# Altium PCB REF-Base.PcbDoc
Units mil, origin at the board's own origin, x right, y up, seen from the top; angles counter-clockwise.
Board outline 1890.07 x 2283.46 mil, 2 copper layers (Top1, Bottom2), stack 63.824 mil thick; 59 components, 105 nets, 332 pads, 188 vias.
Unrouted connection lines stored in the file: 57.
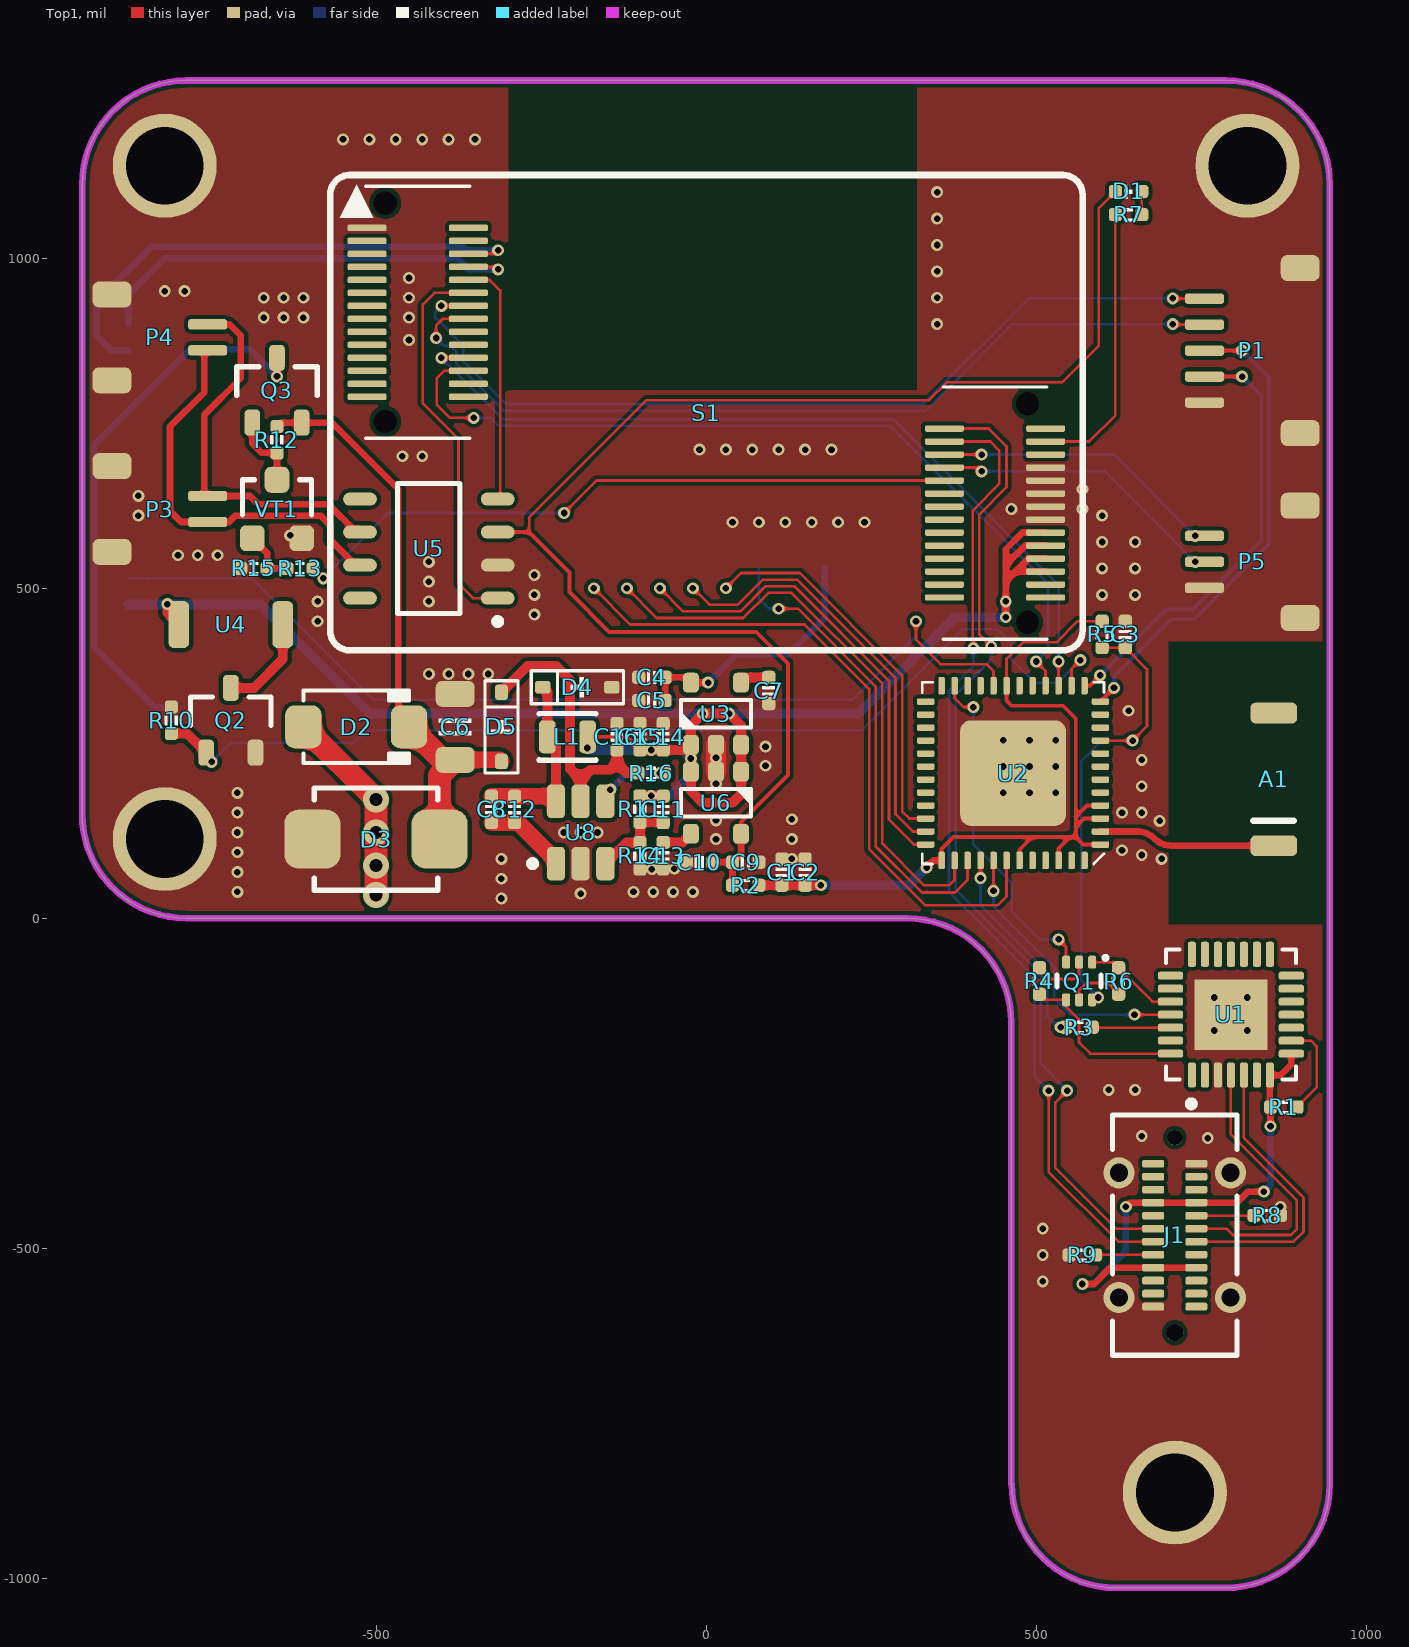
[diagram p0: Top1 view]
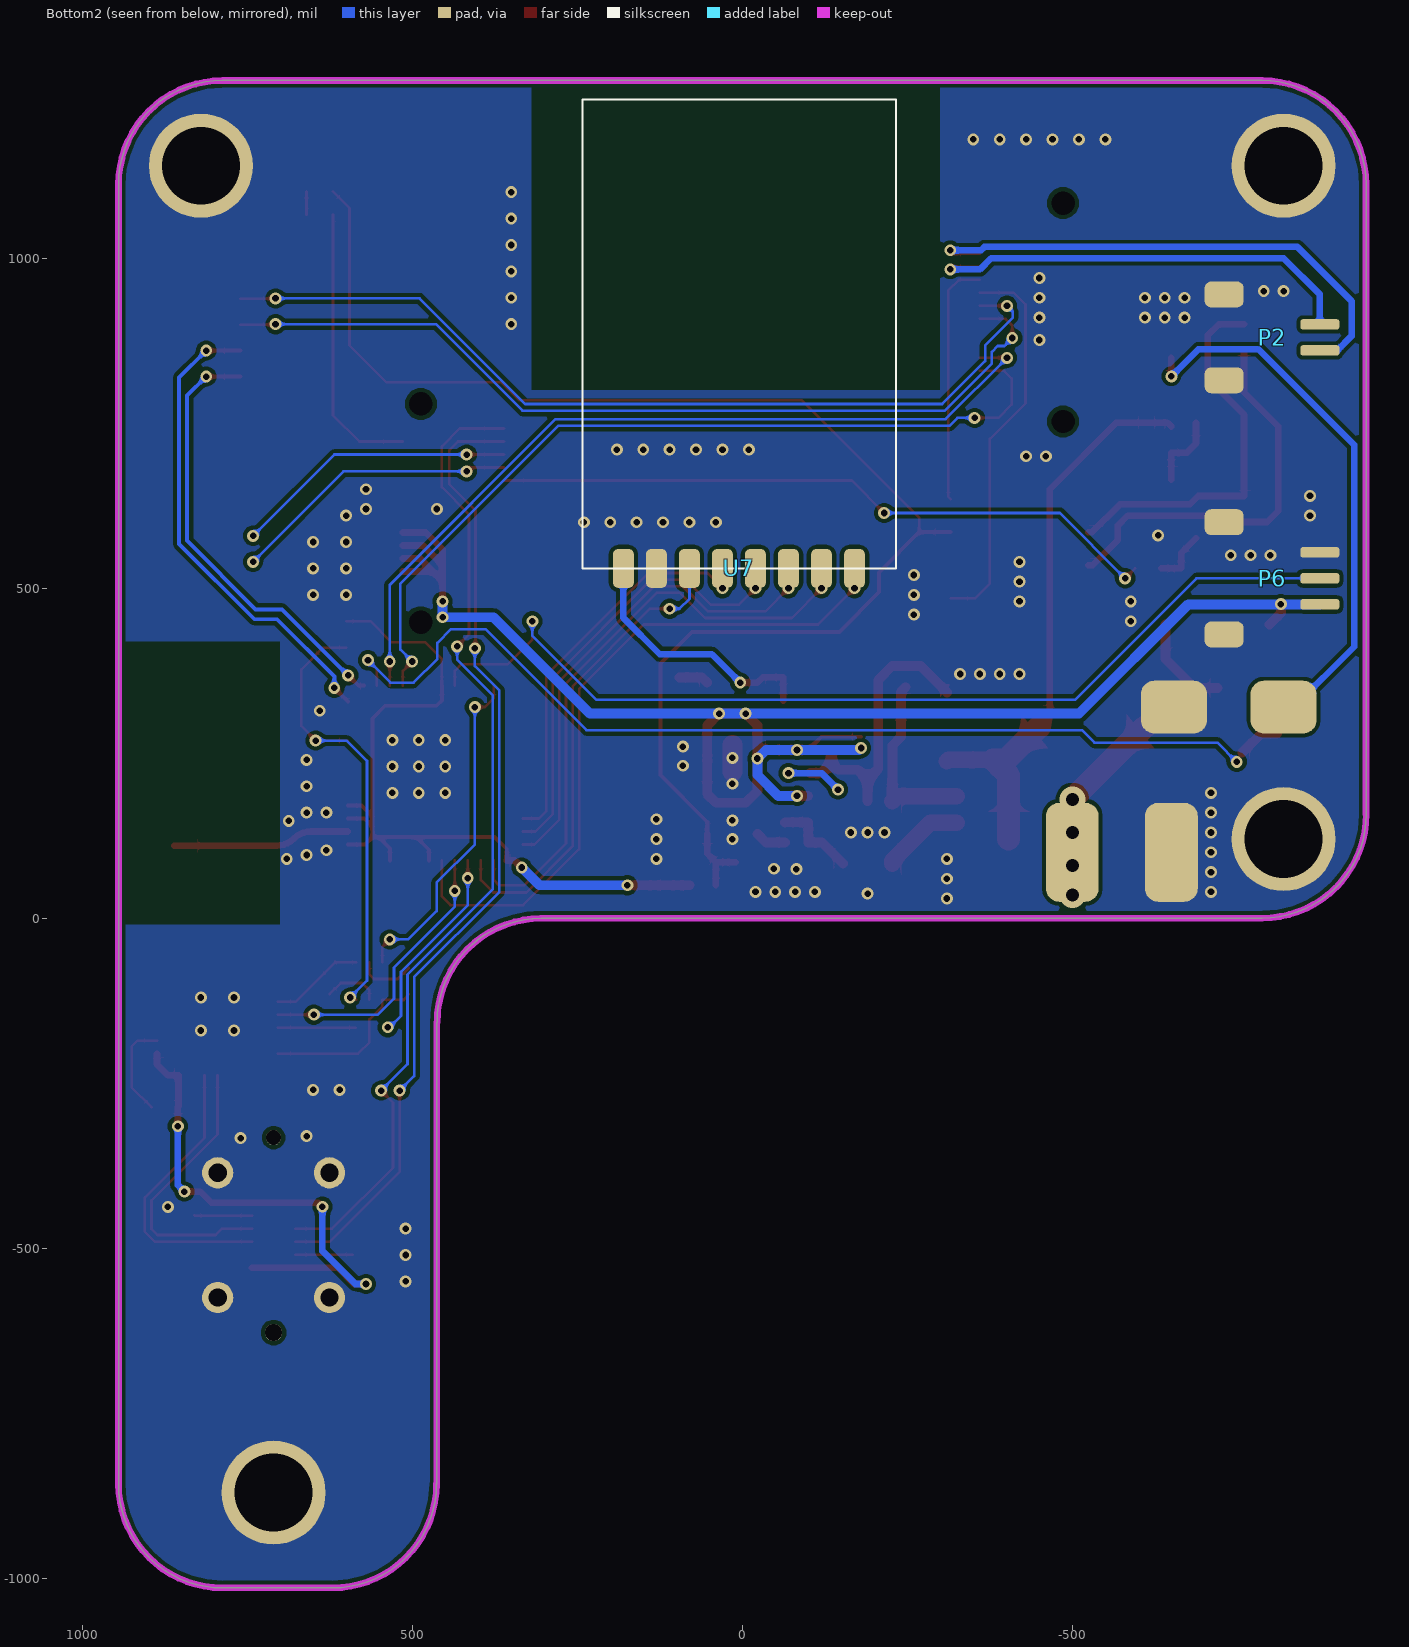
[diagram p1: Bottom2 view, seen from below]
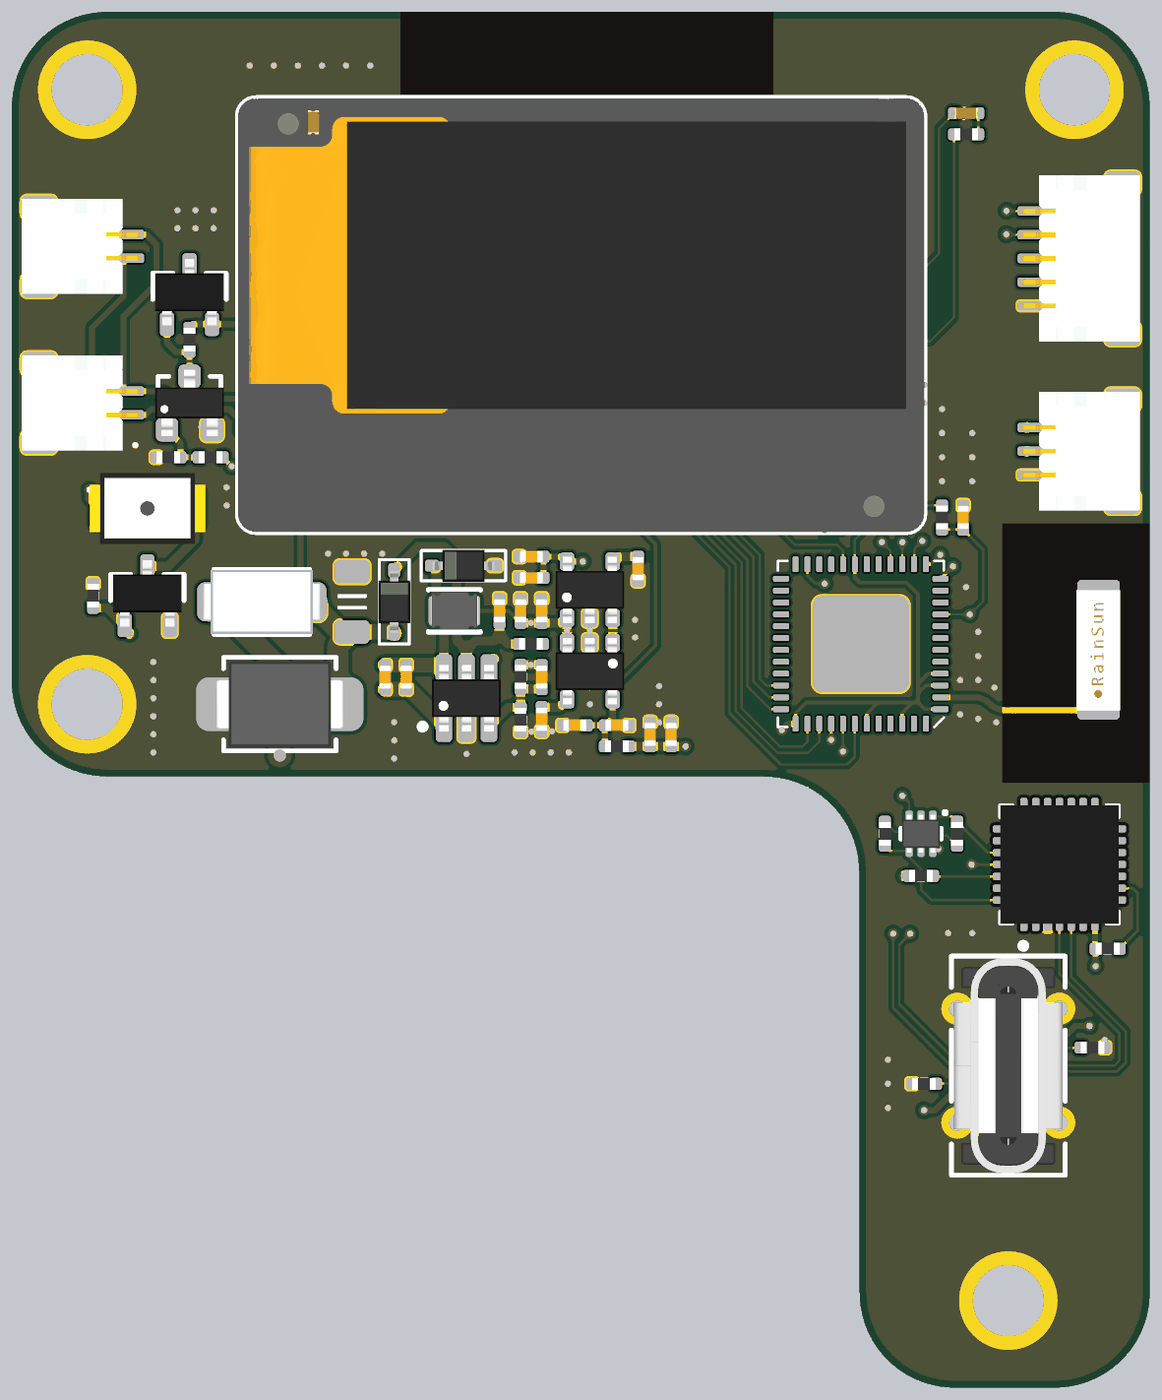
[diagram p2: 3D render of the assembled board from above, using the file's embedded part models]

## Layer stack, top to bottom
Top Solder: solder mask 0.4, Solder Resist, Dk 3.5
Top1: signal copper 1.4
Dielectric1: core 61.0236, FR-4, Dk 4.2
Bottom2: signal copper 1.4
Bottom Solder: solder mask 0.4, Solder Resist, Dk 3.5

## Board outline
-944.88,157.81 -944.88,1111.68 cw(c-787.4,1111.68) -787.4,1269.16 787.4,1269.16 cw(c787.4,1111.68) 944.88,1111.68 944.88,-856.82 cw(c787.4,-856.82) 787.4,-1014.3 620.7,-1014.3 cw(c620.7,-856.82) 463.22,-856.82 462.52,-857.52 462.52,-157.7 462.3,-157.7 ccw(c304.82,-157.7) 304.82,-0.22 304.82,0 -787.7,0 -787.7,0.33 cw(c-787.7,157.81)

## Design rules (kind name [scope] priority, off if disabled: settings)
Clearance Clearance_Logo [InNetClass('Logo')] p1: gap=8 ignorepadtopadclearanceinfootprint=FALSE
Clearance [All] p2: gap=6 ignorepadtopadclearanceinfootprint=FALSE
ComponentClearance [All] p1: gap=0 collisioncheckmode=3 verticalgap=0 showdistances=FALSE
DiffPairsRouting [All] p1: maxlimit=9 minlimit=9 mostfreqgap=9 toplayer_minwidth=15 toplayer_maxwidth=15 toplayer_prefwidth=15 bottomlayer_minwidth=15 bottomlayer_maxwidth=15 bottomlayer_prefwidth=15 maxuncoupledlength=500
FanoutControl Fanout_BGA [All] p1: bgadir=Out bgaviamode=Centered fanoutstyle=Auto fanoutdirection=Alternating viagrid=1 // Fanout_BGA (Default Rule)
HoleSize [All] p1: absolutevalues=TRUE maxlimit=10000 minlimit=8 maxpercent=80.000 minpercent=20.000
MinimumSolderMaskSliver [All] p1 off: minsoldermaskwidth=2
PlaneClearance [All] p1: clearance=8
PlaneConnect [All] p1: planeconnectstyle=Direct reliefexpansion=20 reliefentries=4 reliefconductorwidth=10 reliefairgap=10
PolygonConnect [All] p1: connectstyle=Direct reliefconductorwidth=10 reliefentries=4 polygonreliefangle="90 Angle" airgapwidth=10
RoutingVias [All] p1: holewidth=8 width=16 viastyle="Through Hole" minholewidth=6 minwidth=12 maxholewidth=28 maxwidth=50
SilkToSilkClearance [All] p1: silktosilkclearance=0
SilkToSolderMaskClearance [IsPad] p1: minsilkscreentomaskgap=0 clearancetoexposedcopper=TRUE
SolderMaskExpansion [All] p1: expansion=3 istentingtop=FALSE
Width Logo [InNetClass('Logo')] p1: maxlimit=100 minlimit=0.1 preferedwidth=10
Width GND [(InNet('AGND') OR InNet('GND'))] p2: maxlimit=50 minlimit=4 preferedwidth=10
Width VCC [(InNet('VDD_SYS_3.3V') OR InNet('VDD_AV_3.3V') OR InNet('VDD_5V') OR InNet('VDD1V2-SYS') OR InNet('VDD1V1-EPHY') OR InNet('VDD-CPUX') OR InNet('VDD-CPUS') OR InNet('VDD-CPUFB') OR InNet('VCC-DRAM'))] p3: maxlimit=50 minlimit=4 preferedwidth=10
Width [All] p4: maxlimit=10000 minlimit=4 preferedwidth=4
21 further rules are at their usual default settings.

## Components (designator, comment, footprint, x,y, rotation, side; value= is the part's Value field where it differs from the comment)
A1 "RAINSUN" ANT-Rainsun-AN5120 860,210 r90 top
C1 "10uF" CAP_0402 115,70 r270 top value=0.1u
C2 "0.1uF" CAP_0402 150,70 r270 top value=0.1u
C3 "1uF" CAP_0402 635,430 r90 top value=0.1u
C4 "0.1uF" CAP_0402 -82,365 r0 top value=0.1u
C5 "10uF" CAP_0402 -82,330 r0 top value=0.1u
C6 "100uF" 1206-CAP -380,290 r270 top value=0.1u
C7 "10nF" CAP_0402 95,345 r90 top value=0.1u
C8 "0.1uF" CAP_0402 -325,165 r270 top value=0.1u
C9 "0.1uF" CAP_0402 60,85 r180 top value=0.1u
C10 "10uF" CAP_0402 -10,85 r0 top value=0.1u
C11 "100pF" CAP_0402 -65,165 r270 top value=0.1u
C12 "0.1uF" CAP_0402 -290,165 r270 top value=0.1u
C13 "10nF" CAP_0402 -65,95 r90 top value=0.1u
C14 "0.1uF" CAP_0402 -65,275 r270 top value=0.1u
C15 "10uF" CAP_0402 -100,275 r270 top value=0.1u
C16 "10uF/50V" CAP_0402 -135,275 r270 top value=0.1u
D1 "color?" LED_0402_RED 640,1101 r0 top
D2 "SS54" DO-214AC -530,290 r0 top
D3 "SMBJ28CA" SMBJ-CA_MFG -500,120 r0 top
D4 "二极管-5819W" SOD-323 -195,350 r180 top
D5 "二极管-5819W" SOD-323 -310,290 r90 top
J1 "USB-TYPE-C-STAND" USB-TYPE-C-STAND 710,-480 r90 top locked
L1 "6.8uH" IND-201612 -210,275 r0 top
P1 "SH1.0-5P" SH1.0-5P 755,860 r90 top
P2 "SH1.0-2P" SH1.0-2P -875,880 r270 bottom
P3 "SH1.0-2P" SH1.0-2P -755,620 r270 top
P4 "SH1.0-2P" SH1.0-2P -755,880 r270 top
P5 "SH1.0-3P" SH1.0-3P 755,540 r90 top
P6 "SH1.0-3P" SH1.0-3P -875,515 r270 bottom
Q1 "BC847BVC-7" SOT563-6 565,-95 r180 top
Q2 "AO3400A" SOT23-3 -720,300 r90 top
Q3 "AO3401A" SOT23-3 -650,800 r90 top
R1 "10K" RES_0402 875,-286 r0 top value=22R
R2 "0R" RES_0402 60,50 r0 top value=22R
R3 "200R" RES_0402 565,-165 r0 top value=22R
R4 "12K" RES_0402 505,-95 r90 top value=22R
R5 "10K" RES_0402 600,430 r270 top value=22R
R6 "12K" RES_0402 625,-95 r270 top value=22R
R7 "2K" RES_0402 640,1066 r0 top value=22R
R8 "5.1K" RES_0402 850,-450 r0 top value=22R
R9 "5.1K" RES_0402 570,-510 r180 top value=22R
R10 "10K" RES_0402 -810,300 r270 top value=22R
R11 "10K" RES_0402 -100,165.43 r90 top value=22R
R12 "2K" RES_0402 -650,725 r90 top value=22R
R13 "1K" RES_0402 -615,530 r180 top value=22R
R14 "1.8K" RES_0402 -100,94.57 r90 top value=22R
R15 "10K" RES_0402 -685,530 r180 top value=22R
R16 "1M" RES_0402 -83,220 r0 top value=22R
S1 "REF-Unit" REF-UNIT -569.54,405.93 r0 top locked
U1 "CP2102" QFN-28 795,-146 r90 top value=Value
U2 "ESP32_SIP" QFN-48_7X7 465,220 r180 top
U3 "LP2992 3V3" SOT23-5 15,310 r90 top
U4 "DET402" DET402 -720,445 r0 top
U5 "SN65HVD232D" SO-8 -420,560 r180 top
U6 "LP2992 3V3" SOT23-5 15,175 r270 top
U7 "NRF24L01" NRF24L01-MODULE 180,530 r180 bottom locked
U8 "ME3116" SOT23-6 -190,130 r90 top
VT1 "S8050" SMT_TRIODE_NPN -650,620 r0 top

## Footprints (in the part's own frame and the unit in brackets; to place one, negate y for a bottom-side part, rotate by r counter-clockwise, add the part's x,y. Pads: shape width x height; smd on the part's side, far side on the other; paste and mask are expansions set on the pad)
1206-CAP [mm]
  rrect50% 1x1.5 smd: 1(-1.27,0) 2(1.27,0)
  silkscreen extent -0.3,-0.61 0.3,0.61, body extent -1.5,-0.75 1.5,0.75, height 1.5
ANT-Rainsun-AN5120 [mm] "选择焊盘"
  rrect50% 0.8x1.8 smd: 1(-2.54,0) ""(2.563,0)
  silkscreen extent -1.57,-0.76 -1.57,0.79, body extent -2.57,-0.91 2.54,0.94, height 1.32
CAP_0402 [mil]
  rrect50% 20x20 smd: 1(-20,0) 2(20,0)
  silkscreen extent -7,-9 7,9, body extent -20,-10 20,10, height 20
DET402 [mm]
  rrect50% 0.8x1.8 smd: 1(-2,0) 2(2,0)
  body extent -2.45,-1.5 2.44,1.5, height 2.03
DO-214AC [mil] "SMA"
  rrect50% 55x65 smd: 1(-80,0) 2(80,0)
  silkscreen extent -80,-55 80,55, body extent -98,-53 98,53, height 85
IND-201612 [mil]
  rrect50% 25x50 smd paste+0 mask+0: 1(-30.46,0) 2(30.46,0)
  silkscreen extent -43,-35 43,35, body extent -39,-31 39,32, height 37
LED_0402_RED [mil]
  rrect50% 20x20 smd: 1(-20,0) 2(20,0)
  silkscreen extent -6,-10 6,10, body extent -20,-10 20,10, height 18
NRF24L01-MODULE [mm]
  rrect50% 0.8x1.5 smd: 1(0,0) 2(1.27,0) 3(2.54,0) 4(3.81,0) 5(5.08,0) 6(6.35,0) 7(7.62,0) 8(8.89,0)
  silkscreen extent -1.57,0 10.49,18.03
QFN-28 [mil]
  rrect50% 38x12 smd mask+5: 1(-91.5,59.06) 2(-91.5,39.37) 3(-91.5,19.68) 4(-91.5,0) 5(-91.5,-19.69) 6(-91.5,-39.37) 7(-91.5,-59.06) 15(91.5,-59.06) 16(91.5,-39.37) 17(91.5,-19.69) 18(91.5,0) 19(91.5,19.68) 20(91.5,39.37) 21(91.5,59.06)
  rrect50% 12x38 smd mask+5: 8(-59.06,-91.5) 9(-39.37,-91.5) 10(-19.68,-91.5) 11(0,-91.5) 12(19.68,-91.5) 13(39.37,-91.5) 14(59.06,-91.5) 22(59.06,91.5) 23(39.37,91.5) 24(19.68,91.5) 25(0,91.5) 26(-19.68,91.5) 27(-39.37,91.5) 28(-59.06,91.5)
  rect 106.3x110.24 smd: 29(0,0)
  silkscreen extent -140,-98 98,98, body extent -98,-98 98,98, height 35
QFN-48_7X7 [mm]
  rrect50% 0.675x0.25 smd: 1(-3.363,2.75) 2(-3.363,2.25) 3(-3.363,1.75) 4(-3.363,1.25) 5(-3.363,0.75) 6(-3.363,0.25) 7(-3.363,-0.25) 8(-3.363,-0.75) 9(-3.363,-1.25) 10(-3.363,-1.75) 11(-3.363,-2.25) 12(-3.363,-2.75) 25(3.363,-2.75) 26(3.363,-2.25) 27(3.363,-1.75) 28(3.363,-1.25) 29(3.363,-0.75) 30(3.363,-0.25) 31(3.363,0.25) 32(3.363,0.75) 33(3.363,1.25) 34(3.363,1.75) 35(3.363,2.25) 36(3.363,2.75)
  rrect50% 0.25x0.675 smd: 13(-2.75,-3.363) 14(-2.25,-3.363) 15(-1.75,-3.363) 16(-1.25,-3.363) 17(-0.75,-3.363) 18(-0.25,-3.363) 19(0.25,-3.363) 20(0.75,-3.363) 21(1.25,-3.363) 22(1.75,-3.363) 23(2.25,-3.363) 24(2.75,-3.363) 37(2.75,3.363) 38(2.25,3.363) 39(1.75,3.363) 40(1.25,3.363) 41(0.75,3.363) 42(0.25,3.363) 43(-0.25,3.363) 44(-0.75,3.363) 45(-1.25,3.363) 46(-1.75,3.363) 47(-2.25,3.363) 48(-2.75,3.363)
  rrect20% 4.064x4.064 smd: 49(0,0)
  silkscreen extent -3.5,-3.5 3.5,3.5, body extent -3.5,-3.5 3.5,3.5, height 1
REF-UNIT [mm]
  rrect50% 1.5x0.25 smd: 1(1.422,16.255) 2(5.322,16.255) 3(1.422,15.755) 4(5.322,15.755) 5(1.422,15.255) 6(5.322,15.255) 7(1.422,14.755) 8(5.322,14.755) 9(1.422,14.255) 10(5.322,14.255) 11(1.422,13.755) 12(5.322,13.755) 13(1.422,13.255) 14(5.322,13.255) 15(1.422,12.755) 16(5.322,12.755) 17(1.422,12.255) 18(5.322,12.255) 19(1.422,11.755) 20(5.322,11.755) 21(1.422,11.255) 22(5.322,11.255) 23(1.422,10.755) 24(5.322,10.755) 25(1.422,10.255) 26(5.322,10.255) 27(1.422,9.755) 28(5.322,9.755) 29(23.634,8.533) 30(27.534,8.533) 31(23.634,8.033) 32(27.534,8.033) 33(23.634,7.533) 34(27.534,7.533) 35(23.634,7.033) 36(27.534,7.033) 37(23.634,6.533) 38(27.534,6.533) 39(23.634,6.033) 40(27.534,6.033) 41(23.634,5.533) 42(27.534,5.533) 43(23.634,5.033) 44(27.534,5.033) 45(23.634,4.533) 46(27.534,4.533) 47(23.634,4.033) 48(27.534,4.033) 49(23.634,3.533) 50(27.534,3.533) 51(23.634,3.033) 52(27.534,3.033) 53(23.634,2.533) 54(27.534,2.533) 55(23.634,2.033) 56(27.534,2.033)
  round 0.6 hole 0.9 unplated: ""(2.123,8.806) ""(2.123,17.206) ""(26.833,1.082) ""(26.833,9.482)
  silkscreen extent 0,0 28.96,18.29, body extent 0,0 28.96,18.29, height 7.52
RES_0402 [mil]
  rrect50% 20x20 smd: 1(-20,0) 2(20,0)
  silkscreen extent -6,-10 6,10, body extent -20,-10 20,10, height 14
SH1.0-2P [mm]
  rrect50% 0.4x1.5 smd: 1(-0.5,0) 2(0.5,0)
  rrect50% 1x1.5 smd: SH1(-1.651,-3.683) SH2(1.651,-3.683)
  body extent -2,-4.42 2,0.54, height 3.06
SH1.0-3P [mm]
  rrect50% 0.4x1.5 smd: 1(-1,0) 2(0,0) 3(1,0)
  rrect50% 1x1.5 smd: SH1(-2.159,-3.683) SH2(2.159,-3.683)
  body extent -2.5,-4.42 2.5,0.54, height 3.06
SH1.0-5P [mm]
  rrect50% 0.4x1.5 smd: 1(-2,0) 2(-1,0) 3(0,0) 4(1,0) 5(2,0)
  rrect50% 1x1.5 smd: SH1(-3.175,-3.683) SH2(3.175,-3.683)
  body extent -3.5,-4.42 3.5,0.54, height 3.06
SMBJ-CA_MFG [mm]
  rrect50% 2.16x2.26 smd paste+0 mask+0: 1(-2.45,0) 2(2.45,0)
  silkscreen extent -2.37,-1.97 2.37,1.97, body extent -2.7,-1.81 2.7,1.81, height 2.62
SMT_TRIODE_NPN [mm] "Surface mount NPN transistor, package SOT-23"
  rrect50% 0.95x1 smd: 1(-0.95,-1.125) 2(0.95,-1.125) 3(0,1.125)
  silkscreen extent -1.33,-0.22 1.32,1.13, body extent -1.45,-1.4 1.45,1.4, height 1.3
SO-8 [mm]
  oval 1.3x0.5 smd: 1(-2.65,1.905) 2(-2.65,0.635) 3(-2.65,-0.635) 4(-2.65,-1.905) 5(2.65,-1.905) 6(2.65,-0.635) 7(2.65,0.635) 8(2.65,1.905)
  silkscreen extent -2.78,-2.5 1.2,2.93, body extent -2.89,-2.44 2.89,2.46, height 1.45
SOD-323 [mm]
  rrect50% 0.6x0.5 smd: 1(-1.329,0) 2(1.329,0)
  silkscreen extent -1.78,-0.64 1.78,0.64, body extent -1.3,-0.68 1.3,0.67, height 1.15
SOT23-3 [mm] "SOT23, 3-Leads, Body 3.1x3.0mm (max), Pitch 0.95mm, IPC Medium Density"
  rrect50% 1x0.6 smd: 1(-1.246,0.95) 2(-1.246,-0.95) 3(1.246,0)
  silkscreen extent -0.2,-1.55 0.9,1.55, body extent -1.3,-1.45 1.5,1.45, height 1.2
SOT23-5 [mil]
  rrect50% 30x24 smd: 1(-47,38) 2(-47,0) 3(-47,-38) 4(47,-38) 5(47,38)
  silkscreen extent -21,-53 21,53, body extent -55,-57 55,57, height 57
SOT23-6 [mm]
  rrect50% 1.3x0.7 smd: 1(-1.2,0.95) 2(-1.2,0) 3(-1.2,-0.95) 4(1.2,-0.95) 5(1.2,0) 6(1.2,0.95)
  silkscreen extent -1.32,1.73 -1.08,1.97, body extent -1.4,-1.45 1.4,1.45, height 1.45
SOT563-6 [mm]
  rrect50% 0.305x0.5 smd paste+0 mask+0: 1(-0.5,-0.723) 2(0,-0.723) 3(0.5,-0.723) 4(0.5,0.723) 5(0,0.723) 6(-0.5,0.723)
  silkscreen extent -1.09,-0.97 0.85,0.23, body extent -0.8,-0.8 0.8,0.8, height 0.6
USB-TYPE-C-STAND [mm]
  rrect50% 0.3x0.85 smd: A1(-2.75,0.83) A2(-2.25,0.83) A3(-1.75,0.83) A4(-1.25,0.83) A5(-0.75,0.83) A6(-0.25,0.83) A7(0.25,0.83) A8(0.75,0.83) A9(1.25,0.83) A10(1.75,0.83) A11(2.25,0.83) A12(2.75,0.83) B1(2.75,-0.83) B2(2.25,-0.83) B3(1.75,-0.83) B4(1.25,-0.83) B5(0.75,-0.83) B6(0.25,-0.83) B7(-0.25,-0.83) B8(-0.75,-0.83) B9(-1.25,-0.83) B10(-1.75,-0.83) B11(-2.25,-0.83) B12(-2.75,-0.83)
  round 1.2 hole 0.7: S1(-2.4,2.15) S2(2.4,2.15) S3(-2.4,-2.15) S4(2.4,-2.15)
  round 0.66 hole 0.66 unplated: ""(-3.75,0)
  round 0.58 hole 0.58 unplated: ""(3.75,0)
  silkscreen extent -4.62,-2.4 4.62,2.4, body extent -4.52,-2.3 4.52,2.3, height 7.39

## Part data
A1: library part ANT-Rainsun-AP5120
C1 C2 C3 C4 C5 C7 C8 C9 C10 C11 C12 C13 C14 C15 C16: library part 电容-0402, "Capacitor"
C6: library part 电容-1206, "Capacitor"
D1: library part LED_0402, "LED", Type=0402
D2: library part Diode_SMA, "Diode", Type=SMA
D4 D5: "40V"
J1: Package=None, Availability=Unavailable, DigiKey-Purchase-URL=https://snapeda.com/shop?store=DigiKey&id=3596593, MF="Wurth Electronics", MP=632722110112, Price=None, SnapEDA_Link=https://www.snapeda.com/parts/632722110112/Wurth%20Electronics%20Inc./view-part/3596593/?ref=snap
L1: library part 电感-201612
P5 P6: "Header"
Q2: "N-MOS"
Q3: "P-MOS"
R1 R2 R3 R4 R5 R6 R7 R8 R9 R10 R11 R12 R13 R14 R15 R16: library part 电阻-0402, "Resistor"
S1: "Robot Embedded Framework based on STM43F405RGT6."
U1: "USB转TTL", MFG #1="SILICON LABS", PART DESC="SINGLE-CHIP USB TO UART BRIDGE, QFN28, RoHS.", PART NUMBER=CP2102, RefDes=RefDes, Type=DEV
U2: library part ESP32-PICO
U3 U6: library part LP2992, "LDO"
U5: Manufacturer="Texas Instruments", Manufacturer Part Number=SN65HVD232DR, Operating Temperature="-40°C ~ 85°C", Package / Case="8-SOIC (0.154\", 3.90mm Width)", Supplier Device Package=8-SOIC, Supplier Part Number 1=296-26344-2-ND, Voltage - Supply="3 V ~ 3.6 V", Category="Integrated Circuits (ICs)", ComponentLink1Description=http://www.ti.com/lit/ds/symlink/sn65hvd230.pdf, ComponentLink1URL=http://www.ti.com/lit/ds/symlink/sn65hvd230.pdf, Data Rate=1Mbps, Duplex=Half, Mounting Type="Surface Mount", Number of Drivers/Receivers=1/1, Packaging="Tape & Reel (TR)", Part Status=Active, Pricing 1="2500=0.84375 (USD)", Pricing 2="1=2.05, 10=1.842, 100=1.4809, 500=1.21668, 1000=1.00811 (USD)", Protocol=CAN, RoHS="RoHS Compliant", Stock=5000, Supplier 1=Digi-Key, Supplier 2=Digi-Key, Supplier Part Number 2=296-26344-1-ND, Type=Transceiver
U7: library part NRF24L01模块
U8: "DC-DC"
VT1: library part SMT_TRIODE_NPN, "Surface mount NPN transistor, package SOT-23"

## Free pads (board coordinates)
  round 157.48 hole 118.11: ""(-820,120) ""(-820,1140) ""(710,-870) ""(820,1140)
  rrect50% 100x80 smd far side: ""(-820,320) ""(-654,320)
  rrect50% 80x150 smd far side: ""(-650,100) ""(-500,100)

## Via types
v1: diameter 18, hole 10, Top1 to Bottom2, tented both sides, 184 vias
v2: diameter 39.37, hole 19.68, Top1 to Bottom2, tented both sides, 4 vias

## Nets (pads, with @x,y where several pads share a name; then routed paths per layer and width w, separated by ;. In a path a pad name is that pad's centre, name@x,y a point inside that pad or via, vN(x,y) a via of type N, cw(c..) or ccw(c..) an arc to the next point about the centre after c; other vN are vias at no path point)
3V3A: C1.2 C2.2 R2.2 R5.1 U2.1 U2.3 U2.4 U2.19 U2.37 U2.43 U2.46 | length 1262.7
  Top1 w4: U2.19 455.16,393.16 480,418 531,418 563,450 R5.1
  Top1 w6: U2.37 356.73,104.73 375,123 494,123 ; U2.19 455.16,329.84 463,322 541,322 560,303 560,154 ; U2.43 474.84,103.84 494,123 ; U2.46 533.9,105.9 551,123 ; U2.1 571.27,111.73 560,123 ; U2.3 572.6,151.1 560,138.5 ; U2.4 576.79,170.79 560,154 ; 494,123 551,123 ; 551,123 560,123 ; 560,123 560,138.5 ; 560,138.5 560,154
  Top1 w10: v1(334,77) 344.62,87.62 U2.37
  Top1 w15: R2.2 C1.2 C2.2 v1(174,50)
  Bottom2 w15: v1(174,50) 307,50 v1(334,77)
ADC1_1: S1.28
ADC2_1: S1.26
ADC3_1: S1.4
ADC4_1: S1.2
AGND: S1.34
BOOT_1: Q1.3 U2.23 | length 514.1
  Top1 w4: U2.23 376.42,333.58 390,320 v1(405,320) ; v1(534,-32) 545.32,-43.32 Q1.3
  Bottom2 w4: v1(405,320) 405,112 463,54 463,11 506,-32 v1(534,-32)
BUZZ_1: Q2.1 R10.2 U2.14 | length 1569.8
  Top1 w4: U2.14 553.58,377.58 v1(567,391)
  Top1 w15: R10.2 -786.46,280 Q2.1
  Bottom2 w4: v1(-749,237) -720,266 -533.54,266 -514.54,285 236,285 389,438 441,438 462,417 462,393 498,357 533,357 v1(567,391)
CAN1_H_1: P2.2 S1.6 | length 801.3
  Top1 w4: S1.6 -320.46,1006.54 v1(-315,1012)
  Bottom2 w10: P2.2 -901.31,860.32 -923,882 -923,935 -841,1017 -367,1017 -362,1012 v1(-315,1012)
CAN1_L_1: P2.1 S1.8 | length 681.7
  Top1 w4: S1.8 -318.85,986.85 v1(-315,983)
  Bottom2 w10: P2.1 -875,945 -820,1000 -377,1000 -360,983 v1(-315,983)
CAN2_D_1: S1.12 U5.1 | length 590.1
  Top1 w4: S1.12 -411.52,947.48 -429,930 -429,780 -375,726 -375,507 -353,485 U5.1
CAN2_H_1: P3.2 P4.2 U5.7 | length 607.4
  Top1 w10: P4.2@-760,860.32 -760,797 -812,745 -812,617 -795.31,600.32 -760,600.32 -722.68,600.32 -713,610 -584,610 -569,595 -569,573 -531,535 U5.7
CAN2_L_1: P3.1 P4.1 U5.6 | length 586.3
  Top1 w10: P4.1@-760,899.69 -721.69,899.69 -705,883 -705,818 -760,763 -760,639.69 -690.69,639.69 -678,627 -572,627 -530,585 U5.6
CAN2_R_1: S1.10 U5.4 | length 372.2
  Top1 w4: S1.10 -328.17,967.17 -312,951 -312,638.67 U5.4
CP_Rx_1: U1.25 U2.41 | length 433.4
  Top1 w4: v1(435.47,41.47) U2.41 ; v1(649,-146) U1.25
  Bottom2 w4: v1(435.47,41.47) 435.47,17.53 527.6,-74.6 527.6,-121.67 551.93,-146 v1(649,-146)
CP_Tx_1: R3.1 U2.40 | length 304.6
  Top1 w4: v1(415.79,60.79) U2.40
  Bottom2 w4: v1(415.79,60.79) 415.79,20.21 517,-81 517,-148 534,-165 v1(537,-165)
DTR_1: Q1.4 R4.1 U1.28 | length 262.1
  Top1 w4: R4.1 513.46,-123.46 Q1.4 545.32,-133.32 565,-153 565,-188 582.06,-205.06 U1.28
ESP_EN_1: C3.1 Q1.6 R5.2 U2.9 | length 717.6
  Top1 w4: Q1.6 588.15,-120 v1(594,-120) ; U2.9 v1(646.21,269.21) 668,291 668,377 C3.1 R5.2
  Bottom2 w4: v1(594,-120) 568.39,-94.39 568.39,238.39 599.21,269.21 v1(646.21,269.21)
FLASH_CLK_1: U2.31
FLASH_CS_1: U2.25
FLASH_SD0_1: U2.27
FLASH_SD1_1: U2.33
FLASH_SD2_1: U2.30
FLASH_SD3_1: U2.32
GND: C1.1 C2.1 C3.2 C4.1 C5.1 C6.1 C7.1 C9.1 C10.1 C13.1 C14.1 C15.1 C16.1 D3.1 D4.1 J1.A1 J1.B1 J1.S1 J1.S2 J1.S3 J1.S4 P1.1 P1.SH1 P1.SH2 P2.SH1 P2.SH2 P3.SH1 P3.SH2 P4.SH1 P4.SH2 P5.1 P5.SH1 P5.SH2 P6.1 P6.SH1 P6.SH2 pad.@710,-870 pad.@820,1140 pad.@-650,100 pad.@-654,320 pad.@-820,120 pad.@-820,1140 Q2.2 R8.2 R9.2 R10.1 R14.1 R15.2 S1.1 S1.36 S1.38 S1.40 S1.42 S1.44 U1.3 U1.29 U2.49 U3.2 U5.2 U6.2 U7.2 U8.2 VT1.2 | length 41
  Top1 w30: U6.2 v1(15,243) U3.2
  other v1: 510,-550 510,-510 510,-470 870,-437.07 760,-332.91 660,-330 610,-260 650,-260 770,-170 820,-170 770,-120 820,-120 -310,30 -190,37.48 -710,40 -110,40 -80,40 -50,40 -20,40 -310,60 -710,70 -82,74.57 -48,75 -310,90 130,90 690,90 660,95.85 -710,100 630,103.17 15,120 130,120 -710,130 -215.48,130 -190,130 -164.52,130 687.07,147.56 15,148.3 130,150 -710,160 630,160 660,160 -710,190 450,190 490,190 530,190 660,200 15,203.76 450,230 490,230 530,230 90,231 660,240 90,260 450,270 490,270 530,270 640,314.34 -420,370 -390,370 -360,370 -330,370 -588.5,450 -260,460 -588.5,480 -420,480 -260,490 600,490 650,490 -420,510 -260,520 600,530 650,530 -420,540 -800,550 -770,550 -740,550 600,570 650,570 -630,580 40,600 80,600 120,600 160,600 200,600 240,600 -860,610 600,610 462.54,620 570,620 -860,640 570,650 -460,700 -430,700 -10,710 30,710 70,710 110,710 150,710 190,710 -450,876.02 350,900 -670,910 -640,910 -610,910 -450,910 -670,940 -640,940 -610,940 -450,940 350,940 -820,950 -790,950 -450,970 350,980 350,1020 350,1060 350,1100 -550,1180 -510,1180 -470,1180 -430,1180 -390,1180 -350,1180
GPIO2_1: U2.22
GPIO4_1: U2.24
GPIO5_1: U2.34 U7.4 | length 586.9
  Top1 w4: v1(30,500) 53,523 142,523 297,368 297,162 307.9,151.1 U2.34
GPIO9_1: U2.28
GPIO10_1: U2.29
GPIO12_1: U2.18
GPIO13_1: P6.2 U2.20 | length 1518.7
  Top1 w4: v1(318,450) 318,422 355,385 425,385 435.47,374.53 U2.20
  Bottom2 w4: P6.2 -688,515 -504,331 221,331 318,428 v1(318,450)
GPIO14_1: U2.17
GPIO15_1: U2.21
GPIO18_1: U2.35 U7.5 | length 657.5
  Top1 w4: v1(-20,500) 5,475 48,475 86,513 137.86,513 287,363.86 287,157.75 313.33,131.42 U2.35
GPIO19_1: U2.38 U7.7 | length 889.1
  Top1 w4: v1(-120,500) -75,455 56.28,455 94.28,493 129.57,493 267,355.57 267,113.28 330.28,50 368.31,50 376.42,58.1 U2.38
GPIO21_1: U2.42 U7.8 | length 1025.8
  Top1 w4: v1(-170,500) -115,445 149.29,445 247,347.29 247,105 332,20 442,20 455.16,33.16 U2.42
GPIO22_1: U2.39 U7.3 | length 725.8
  Top1 w4: v1(110,469) 139.43,469 257,351.43 257,109.14 327.14,39 377,39 396.1,58.1 U2.39
  Bottom2 w4: U7.3 80,484 95,469 v1(110,469)
GPIO23_1: U2.36 U7.6 | length 718.1
  Top1 w4: v1(-70,500) -35,465 52.14,465 90.14,503 133.72,503 277,359.72 277,149.42 314.69,111.73 U2.36
GPIO26_1: S1.22 U2.15 | length 1271
  Top1 w4: v1(-401,849) S1.22 ; U2.15 v1@533.9,388.9
  Bottom2 w4: v1(-401,849) -308,756 283.14,756 534,505.14 v1(534,389)
GPIO27_1: S1.24 U2.16 | length 1298.9
  Top1 w4: S1.24 -396.63,829.37 -408,818 -408,778 -388,758 v1(-352,758) ; v1(500,389) 514.21,374.79 U2.16
  Bottom2 w4: v1(-352,758) -326,758 -314,746 279,746 518,507 518,407 v1(500,389)
GPIO32_1: P1.3 U2.12 | length 726.5
  Top1 w6: U2.12 597.38,328.38 v1(618,349) ; P1.3@760,860 v1(812,860)
  Bottom2 w6: v1(618,349) 618,366 705,453 739,453 853,567 853,819 v1(812,860)
GPIO33_1: P1.2 U2.13 | length 671.4
  Top1 w6: U2.13 581.38,352.38 v1(597,368) ; P1.2@760,820.63 v1(812,820.63)
  Bottom2 w6: v1(597,368) 697,468 737.03,468 841,571.97 841,791.63 v1(812,820.63)
GPIO34_1: U2.10
GPIO35_1: U2.11
GPIO37_1: U2.6
GPIO38_1: U2.7
I2C_SCL_1: S1.3
I2C_SDA_1: S1.5
NetA1_1: A1.1 U2.2 | length 268.3
  Top1 w10: U2.2 653.85,131.42 cw(c653.85,95.85) 679,121 ccw(c705.56,147.56) 705.56,110 A1.1
NetC7_2: C7.2 U3.4 | length 45.3
  Top1 w15: U3.4 61,365 C7.2
NetC8_1: C8.1 C12.1 D4.2 L1.1 U8.6 | length 281.8
  Top1 w15: D4.2 -240.46,343.13 L1.1 -227.4,261.94 U8.6
  Top1 w25: C8.1 C12.1 -235.16,185 U8.6
NetC8_2: C8.2 C12.2 U8.1 | length 126.1
  Top1 w25: C8.2 C12.2 -285,145 -227.4,87.4 U8.1
NetC11_2: C11.2 R11.1 R14.2 U8.3 | length 131.8
  Top1 w15: U8.3 -120.79,114.57 R14.2 R11.1 -65.43,145.43 C11.2
NetC13_2: C13.2 U6.4 | length 47.4
  Top1 w15: C13.2 -36,115 U6.4
NetC16_2: C16.2 D5.2 R16.1 U8.5 | length 443.1
  Top1 w15: D5.2 -270.34,382 -227,382 -206,361 -206,226 -190,210 ; U8.5 -190,210 ; C16.2 -135,235 ; R16.1 -120,220 -135,235 ; -190,210 -175,225 -145,225 -135,235
NetD1_2: D1.2 R7.2 | length 35
  Top1 w4: R7.2 D1.2
NetJ1_A5: J1.A5 R9.1 | length 86.9
  Top1 w4: R9.1@590.47,-509.53 J1.A5
NetJ1_B5: J1.B5 R8.1 | length 87.5
  Top1 w4: J1.B5 829.53,-450.47 R8.1
NetQ1_2: Q1.2 R4.2 | length 88.4
  Top1 w4: R4.2 522,-92 558,-92 565,-85 Q1.2
NetQ1_5: Q1.5 R6.2 | length 86.1
  Top1 w4: Q1.5 565,-109 576,-98 608,-98 R6.2
NetQ2_3: Q2.3 U4.2 | length 149.1
  Top1 w15: Q2.3 -684.94,349.06 -641.26,392.74 U4.2
NetQ3_1: Q3.1 R12.1 VT1.3 | length 115.6
  Top1 w10: Q3.1 -687.4,719.4 -673,705 R12.1 VT1.3
NetR1_2: R1.2 U1.9 | length 146.5
  Top1 w4: U1.9 916.37,-185.37 925,-194 925,-256 R1.2
NetR3_2: R3.2 U1.26 | length 117.8
  Top1 w4: R3.2@585.69,-165.68 U1.26
NetR13_2: R13.2 R15.1 VT1.1 | length 85
  Top1 w10: VT1.1 -665,553.31 R15.1 R13.2
NetR16_2: R16.2 U8.4 | length 85.4
  Bottom2 w10: v1(-145,195) -120,220 v1(-70,220)
PA4_1: S1.49
PA6_1: S1.51
PC0_1: S1.25
PC1_1: S1.21
PC8_1: R7.1 S1.32 | length 426
  Top1 w4: S1.32 580.18,722.18 620,762 R7.1
PC13_1: S1.27
PC14_1: S1.23
PC15_1: S1.19
PWM_A1_1: R13.1 S1.37 | length 1023.5
  Top1 w4: R13.1 v1(-580,515) ; v1(-215,614) -165.88,663.12 S1.37
  Bottom2 w4: v1(-580,515) -481,614 v1(-215,614)
PWM_A2_1: S1.39
PWM_B1_1: S1.41
PWM_B2_1: S1.43
RTS_1: Q1.1 R6.1 U1.24 | length 143.6
  Top1 w4: Q1.1 616.54,-66.54 R6.1 657,-107 676.32,-126.32 U1.24
SENSOR_VN_1: U2.8
SENSOR_VP_1: U2.5
SPI1_MISO_1: S1.17
SPI1_MOSI_1: S1.13
SPI1_SCK_1: S1.15
SPI3_MISO_1: S1.9
SPI3_MOSI_1: S1.11
SPI3_SCK_1: S1.7
SWCLK_1: P5.2 S1.35 | length 439.2
  Top1 w4: S1.35 411.7,682.81 v1(417.51,677)
  Bottom2 w4: v1(417.51,677) 604,677 v1(741,540)
SWDIO_1: P5.3 S1.33 | length 431.1
  Top1 w4: S1.33 v1(417.51,702.49)
  Bottom2 w4: v1(417.51,702.49) 617.88,702.49 v1(741,579.37)
SWITCH_LED+_1: pad.@-820,320 Q3.3 | length 832.5
  Top1 w10: v1(-650,821) Q3.3
  Bottom2 w10: pad.@-820,320 -835.54,320 -927,411.46 -927,717 -782,862 -691,862 v1(-650,821)
UART1_Rx_1: P1.5 S1.14 | length 1366.6
  Top1 w4: v1@-400.94,927.8 S1.14 ; v1@707.26,938.74 P1.5@760,938.74
  Bottom2 w4: v1(-401,927.74) -410,918.74 -410,910 -368,868 -368,844.28 -302.72,779 328.86,779 488.86,939 v1(707,939)
UART1_Tx_1: P1.4 S1.16 | length 1350.8
  Top1 w4: v1(-409,879) -409,898 -398.89,908.11 S1.16 ; v1@707.63,899.37 P1.4@760,899.37
  Bottom2 w4: v1(-409,879) -397,867 -387,867 -378,858 -378,840.14 -306.86,769 333,769 464,900 v1(707,900)
UART5_Rx_1: S1.18
UART5_Tx_1: S1.20
USB_ESP_DM_1: J1.B7 U1.5 | length 443.4
  Top1 w4: J1.B7 787.84,-489.84 890.16,-489.84 905,-475 905,-423 814.69,-332.68 U1.5
USB_ESP_DP_1: J1.B6 U1.4 | length 434.8
  Top1 w4: J1.B6 788.16,-470.16 797.84,-479.84 886.02,-479.84 895,-470.86 895,-427.14 795,-327.14 U1.4
USB_ST_DM_1: J1.A7 S1.29 | length 1509
  Top1 w4: S1.29 428.14,741.86 455,715 455,653 414,612 414,430 v1(432,412) ; v1(547,-261) 529,-279 529,-378 621.16,-470.16 J1.A7
  Bottom2 w4: v1(432,412) 432,392 378,338 378,43.86 507,-85.14 507,-221 v1(547,-261)
USB_ST_DP_1: J1.A6 S1.31 | length 1478.6
  Top1 w4: S1.31 430.82,722.18 444,709 444,658 404,618 404,410 v1(405,409) ; v1(519,-261) 519,-384 624.84,-489.84 J1.A6
  Bottom2 w4: v1(405,409) 405,382 368,345 368,39.72 497,-89.28 497,-239 v1(519,-261)
VCC: C6.2 D2.2 D3.2 D5.1 Q3.2 R12.2 | length 886.3
  Top1 w10: R12.2 -644.06,750.94 Q3.2 -566.94,750.94 -466,650 -466,306 D2.2
  Top1 w25: C6.2 -312.34,240 D5.1
  Top1 w35: D2.2 -400,240 C6.2 -390,230 -403.54,216.46 D3.2
VCC_3V3: C9.2 C10.2 D1.1 R2.1 U5.3 U6.5 | length 2176.9
  Top1 w4: -268,585 -268,607 -90,785 338,785 365,812 539,812 595,868 595,1076 D1.1
  Top1 w6: U5.3 -268,585 -207,524 -207,494 -147,434 76,434 124,386 124,217 53,146 U6.5
  Top1 w10: C10.2 C9.2 ; R2.1 C9.2 ; U6.5 53,98 C9.2
VCC_3V3_RD: C4.2 C5.2 U3.5 U7.1 | length 395.9
  Top1 w10: C5.2 C4.2 -31,365 U3.5 v1(3,357)
  Bottom2 w10: v1(3,357) 46,400 125,400 180,455 U7.1
VCC_5V: C11.1 C14.2 C15.2 L1.2 P6.3 R11.2 S1.46 S1.48 S1.50 S1.52 U3.1 U3.3 U4.1 U6.1 U6.3 | length 2738.2
  Top1 w6: L1.2 -120,275 C15.2
  Top1 w10: v1(454,456) 454,479 453,480 v1(454,480) 454,511 ; S1.52 468.33,525.33 ; S1.50 488.01,545.01 468.33,525.33 ; S1.48 483.7,564.7 454,535 ; S1.46 479.38,584.38 454,559 454,535 ; 454,511 468.33,525.33 ; 454,511 454,535
  Top1 w15: v1(-816,476) -816,462.26 U4.1 ; C15.2 v1(-83,255) C14.2 -31,255 U3.1 ; R11.2@-99.57,185 R11.2 v1(-83,185.43) C11.1@-65.43,185.43 ; U3.1 -23,292 v1(-5,310) v1(35,310) 53,292 U3.3 U6.1 53,188 40,175 -5,175 -23,193 U6.3 v1(-23,242) U3.1
  Bottom2 w15: P6.3 -675.63,475.63 -510,310 v1(-5,310) v1(35,310) 231,310 377,456 v1(454,456) 454,479 453,480 v1(454,480) ; v1(-180,258) -177,255 v1(-83,255) -36,255 v1(-23,242) -23,217 -54.57,185.43 v1(-83,185.43)
VCC_IN: D2.1 pad.@-500,100 | length 300.6
  Top1 w35: D2.1 v2(-500,180) v2(-500,130) v2(-500,80) v2(-500,35)
VDD_USB: J1.A4 J1.A9 J1.B4 J1.B9 R1.1 U1.7 U1.8 | length 790.4
  Top1 w10: v1(570,-554) 588,-554 612.79,-529.21 J1.A4 J1.B9 ; v1(636,-437) 642.21,-430.79 J1.A9 J1.B4 804.21,-430.79 821,-414 v1(845,-414) ; R1.1@854.06,-285.06 U1.7 870.5,-237.5 886.5,-221.5 U1.8 ; v1(855,-315) R1.1
  Bottom2 w10: v1(570,-554) 586,-554 636,-504 v1(636,-437) ; v1(845,-414) 855,-404 v1(855,-315)
pads on no net: A1. J1. J1.A2 J1.A3 J1.A8 J1.A10 J1.A11 J1.A12 J1.B2 J1.B3 J1.B8 J1.B10 J1.B11 J1.B12 S1. S1.30 S1.45 S1.47 S1.53 S1.54 S1.55 S1.56 U1.1 U1.2 U1.6 U1.10 U1.11 U1.12 U1.13 U1.14 U1.15 U1.16 U1.17 U1.18 U1.19 U1.20 U1.21 U1.22 U1.23 U1.27 U2.26 U2.44 U2.45 U2.47 U2.48 U5.5 U5.8

## Polygon pours and split planes (outlines as drawn)
GND on Top1 "GND_L01_P000" (solid, remove dead copper, pour order 0): -950,1300 950,1300 950,-1050 -950,-1050
GND on Bottom2 "GND_L02_P001" (solid, remove dead copper, pour order 1): -950,1300 950,1300 950,-1050 -950,-1050

## Keep-outs
Keep-Out Layer:
  lines w10: -945.19,157.81 ccw(c-787.7,157.81) -787.7,0.33 ; -944.88,157.81 -944.88,490.15 -944.88,1111.68 cw(c-787.4,1111.68) -787.4,1269.16 787.4,1269.16 cw(c787.4,1111.68) 944.88,1111.68 944.88,-856.82 cw(c787.4,-856.82) 787.4,-1014.3 620.7,-1014.3 cw(c620.7,-856.82) 463.22,-856.82 ; -787.7,0 304.82,0 ; 304.82,-0.22 cw(c304.82,-157.7) 462.3,-157.7 ; 462.52,-857.52 462.52,-157.7

## Other copper
Top1:
  pour cut-out: -300,1300 320,1300 320,800 -300,800
  pour cut-out: 1000,420 1000,-10 700,-10 700,420
Bottom2:
  pour cut-out: -300,1300 320,1300 320,800 -300,800
  pour cut-out: 1000,420 1000,-10 700,-10 700,420

## Silkscreen, mask and mechanical layers (free items; w line width, h text height)
Top Solder:
  rectangle: -300,800 320,1300
  rectangle: 700,-10 1000,420
Bottom Solder:
  rectangle: -300,800 320,1300
  rectangle: 700,-10 1000,420
  text "|<" at -597.1,243.81 h70
  text "+ -" at -432.1,152.81 h150
Mechanical 1:
  lines w10: -945.19,157.81 ccw(c-787.7,157.81) -787.7,0.33 ; -944.88,157.81 -944.88,490.15 -944.88,1111.68 cw(c-787.4,1111.68) -787.4,1269.16 787.4,1269.16 cw(c787.4,1111.68) 944.88,1111.68 944.88,-856.82 cw(c787.4,-856.82) 787.4,-1014.3 620.7,-1014.3 cw(c620.7,-856.82) 463.22,-856.82 ; -787.7,0 304.82,0 ; 304.82,-0.22 cw(c304.82,-157.7) 462.3,-157.7 ; 462.52,-857.52 462.52,-157.7